# EAGLE board MIDIWidgetCradleRevB (EAGLE 6.6.0)
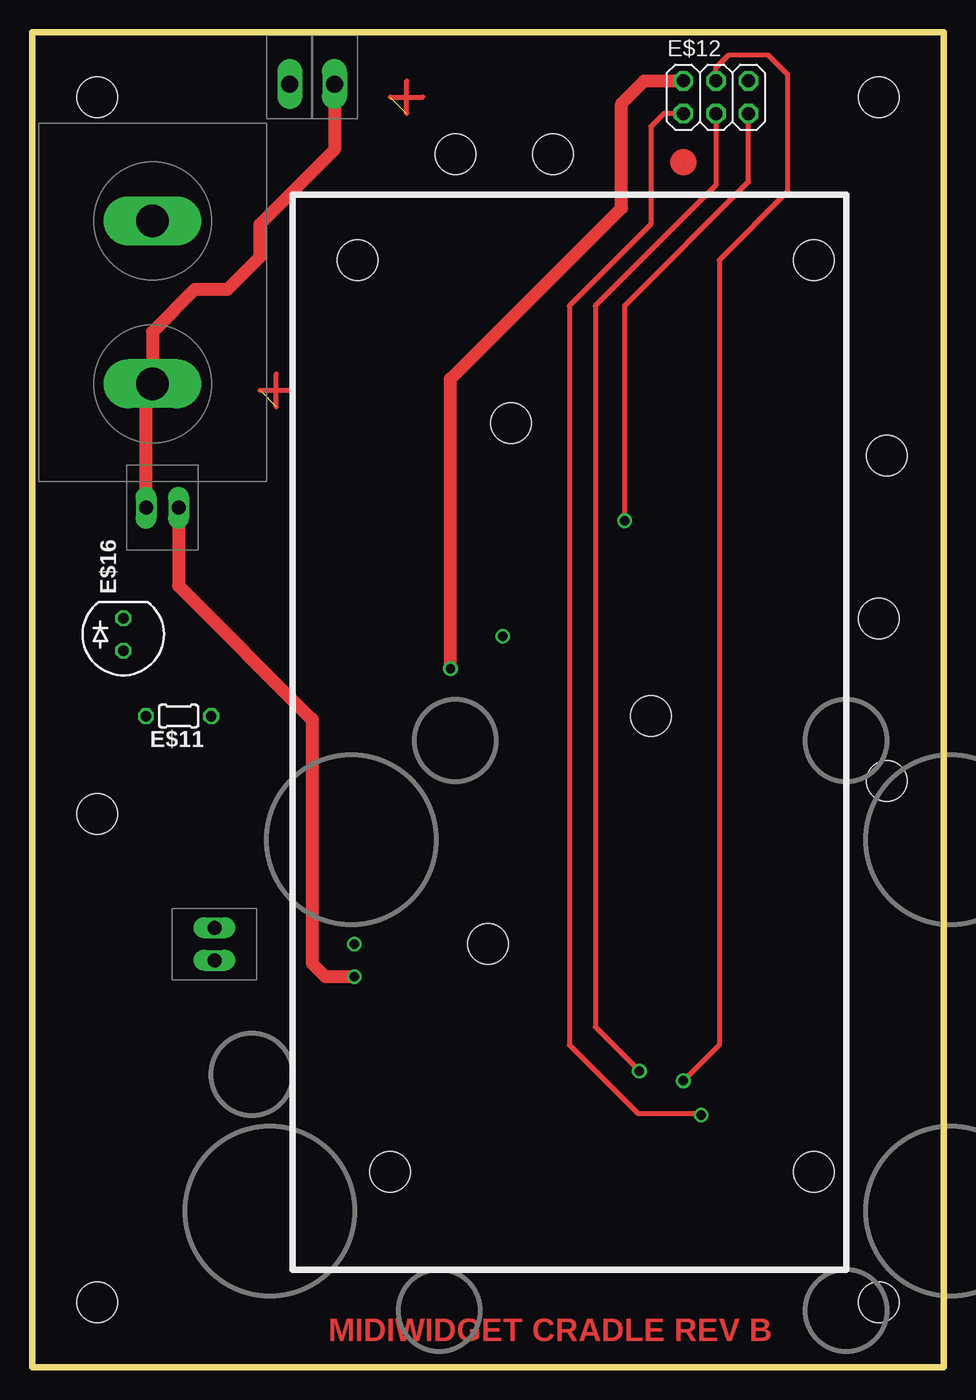
[diagram p0: board, top side]
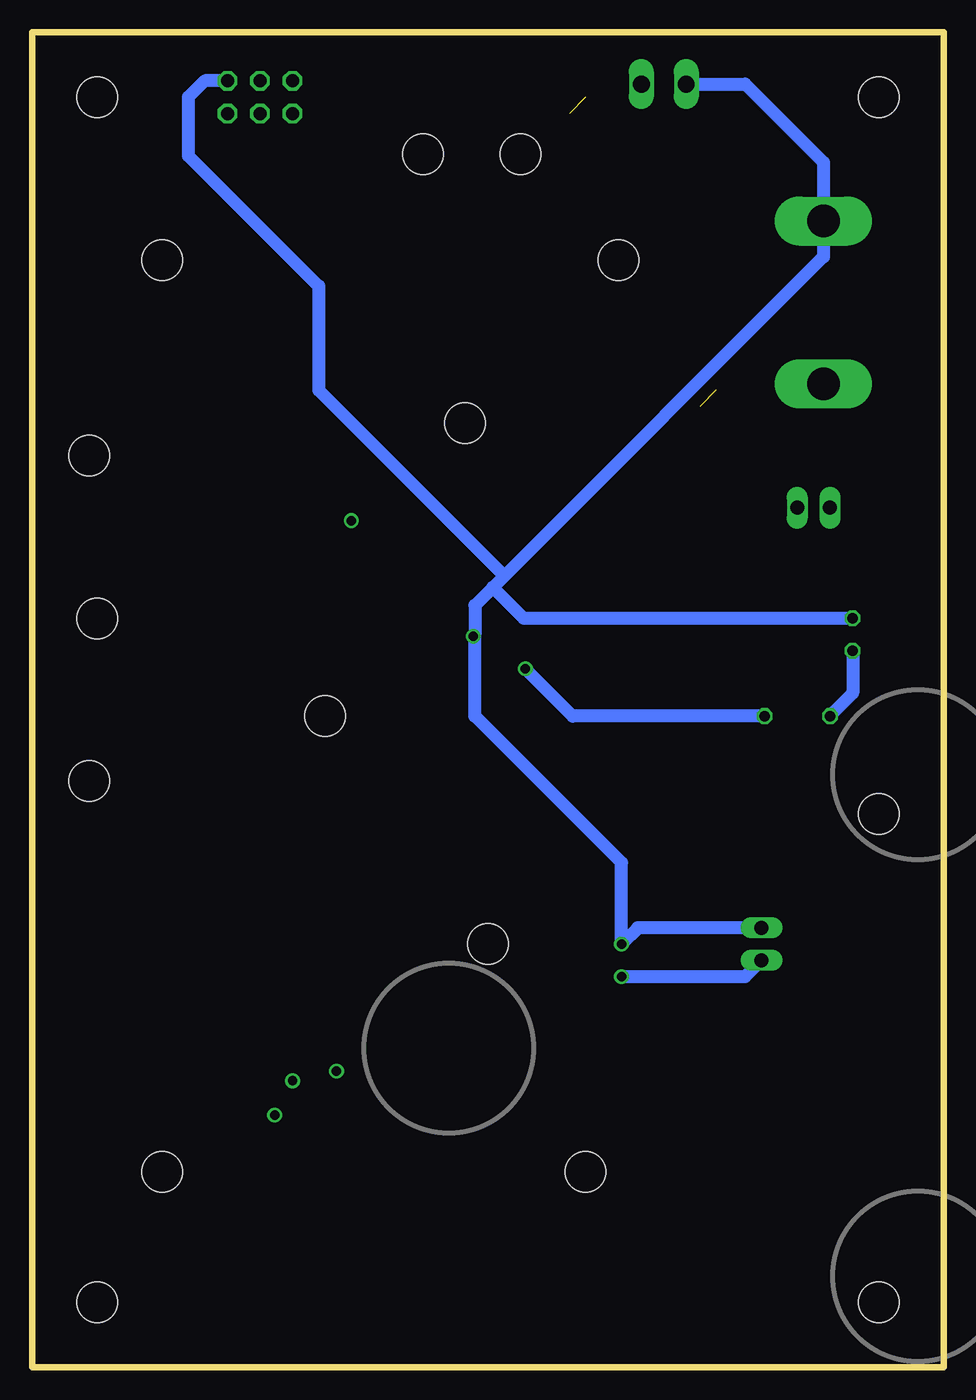
[diagram p1: board, bottom side, seen from below]

Size 71.12 x 104.14 mm. Coordinates in mm from the lower left corner, seen from the top.
Outline: 0,0 0,104.14 71.12,104.14 71.12,0 0,0
Copper layers (1*16): Top 0.0178mm / dielectric 59mil / Bottom 0.0178mm
Design rules "SSC-EAGLE-2Lyr_v1.0.0.3": minimum track width 10mil, minimum drill 14mil, track to track 10mil, track to pad 10mil, pad to pad 10mil, via to via 10mil, smd to smd 10mil, copper to edge 40mil, drill to drill 16mil, minimum pad ring 8mil, minimum via ring 8mil, stop-mask expansion 3mil, vias tented up to drill 0mil, thermal gap 10mil
Net classes: 0 default: width 0.254 mm, drill 0.305 mm, clearance 0.254 mm; 2 superfat: width 0.61 mm, drill 0.406 mm, clearance 0.762 mm; 3 grounder: width 0.254 mm, drill 0.508 mm, clearance 0.254 mm
Holes 3.17 mm at 66.67,45.72 33.02,94.62 66.67,71.12 5.08,5.08 5.08,43.18 66.04,5.08 66.04,99.06 5.08,99.06 37.34,73.66 48.26,50.8 60.96,15.24 27.94,15.24 60.96,86.36 25.4,86.36 40.64,94.62 35.56,33.02 66.04,58.42

## Footprints (pad centres in the part's own frame; a part is rotated, then mirrored left to right if it is on the bottom)
STUD9V = drill 2.54 long: P$1 -6.35,0; P$2 6.35,0
TERMINAL-BLOCK-3-5-2POS = drill 1.3 long: P$1 1.75,0; P$2 -1.75,0
SPRING-CONTACT-025 = drill 0.737: P$1 0,0
0204/5 = drill 0.813 octagon: 1 -2.54,0; 2 2.54,0
2X03 = drill 1.016 octagon: 1 -2.54,-1.27; 2 -2.54,1.27; 3 0,-1.27; 4 0,1.27; 5 2.54,-1.27; 6 2.54,1.27
TB-2-54-2POS = drill 1.092 long: P$1 1.27,0; P$3 -1.27,0
LED5MM = drill 0.813 octagon: A -1.27,0; K 1.27,0

## Placement (x,y rotation side)
E$1  [STUD9V]  9.4,83.06 90 top
E$2  [TERMINAL-BLOCK-3-5-2POS]  21.84,100.08 180 top
E$3  [SPRING-CONTACT-025]  46.23,66.04 0 top
E$4  [SPRING-CONTACT-025]  25.15,33.02 0 top
E$5  [SPRING-CONTACT-025]  47.37,23.11 0 top
E$6  [SPRING-CONTACT-025]  52.2,19.68 0 top
E$7  [SPRING-CONTACT-025]  50.8,22.35 0 top
E$8  [SPRING-CONTACT-025]  32.64,54.48 0 top
E$9  [SPRING-CONTACT-025]  36.7,57.02 0 top
E$10  [SPRING-CONTACT-025]  25.15,30.48 0 top
E$11  [0204/5]  11.43,50.8 180 top
E$12  [2X03]  53.34,99.06 0 top
E$13  [TB-2-54-2POS]  14.22,33.02 270 top
E$15  [TB-2-54-2POS]  10.16,67.06 180 top
E$16  [LED5MM]  7.11,57.15 90 top

## Library data of the parts
E$1-E$10 E$13 E$15 E$16 = 0jrs
E$11 = rcl
E$12 = pinhead

## Nets
GND: E$1.P$2 E$2.P$1 E$4.P$1 E$9.P$1 E$12.6 E$13.P$3 E$16.K
ICSPCLK: E$5.P$1 E$12.3
ICSPDAT: E$6.P$1 E$12.1
S$2: E$3.P$1 E$12.5
S$8: E$11.2 E$16.A
VDD: E$8.P$1 E$11.1 E$12.2
VIN: E$1.P$1 E$2.P$2 E$15.P$1
VINRECT: E$10.P$1 E$13.P$1 E$15.P$3
VPP: E$7.P$1 E$12.4

## Tracks (layer width: path | path; a pad name or v marks a point on that pad's centre or on a via)
DOCCOPPER  (1 unrouted)
  Top 0.406: 29.21,97.79 29.21,100.33 | 27.94,99.06 30.48,99.06
DOCCOPPER1  (1 unrouted)
  Top 0.406: 19.05,74.93 19.05,77.47 | 17.78,76.2 20.32,76.2
GND
  Bottom 1.016: E$2.P$1 15.49,100.08 9.4,93.98 E$1.P$2 9.4,86.61 34.29,61.72 | 34.29,61.72 35.18,60.83 | 35.18,60.83 36.58,59.44 36.58,57.15 E$9.P$1 36.58,56.9 36.58,50.8 25.15,39.37 E$4.P$1 23.88,34.29 E$13.P$3 | E$16.K 32.77,58.42 35.18,60.83 | E$12.6 57.66,100.33 58.93,99.06 58.93,94.49 48.77,84.33 48.77,76.2 34.29,61.72
ICSPCLK
  Top 0.406: E$12.3 53.34,92.2 43.94,82.8 43.94,26.54 E$5.P$1
ICSPDAT
  Top 0.406: E$12.1 49.28,97.79 48.26,96.77 48.26,89.15 41.91,82.8 41.91,25.15 47.24,19.81 52.07,19.81 E$6.P$1
S$2
  Top 0.406: E$3.P$1 46.23,82.8 55.88,92.46 E$12.5
S$8
  Bottom 1.016: E$16.A 7.11,52.58 E$11.2
VDD
  Top 1.016: E$8.P$1 32.64,77.09 45.97,90.42 45.97,98.55 47.75,100.33 E$12.2
  Bottom 1.016: E$11.1 28.96,50.8 E$8.P$1
VIN
  Top 1.016: E$2.P$2 23.59,94.97 17.78,89.15 17.78,86.61 15.24,84.07 12.7,84.07 9.4,80.77 E$1.P$1 8.89,76.2 E$15.P$1
VINRECT
  Top 1.016: E$15.P$3 11.43,60.96 21.84,50.55 21.84,31.5 22.86,30.48 E$10.P$1
  Bottom 1.016: E$10.P$1 15.49,30.48 E$13.P$1
VPP
  Top 0.406: E$12.4 53.34,101.35 54.36,102.36 57.4,102.36 58.93,100.84 58.93,91.69 53.59,86.36 53.59,25.15 E$7.P$1
(copper drawn outside any net)
  shapes: Top circle x1

## Text on the board
Top: MIDIWIDGET CRADLE REV B